# Altium PCB PCB1.PcbDoc
Units mil, origin at the board's own origin, x right, y up, seen from the top; angles counter-clockwise.
Board outline 5019.68 x 3326.77 mil, 2 copper layers (Top Layer, Bottom Layer); 21 components, 13 nets, 70 pads, 0 vias.
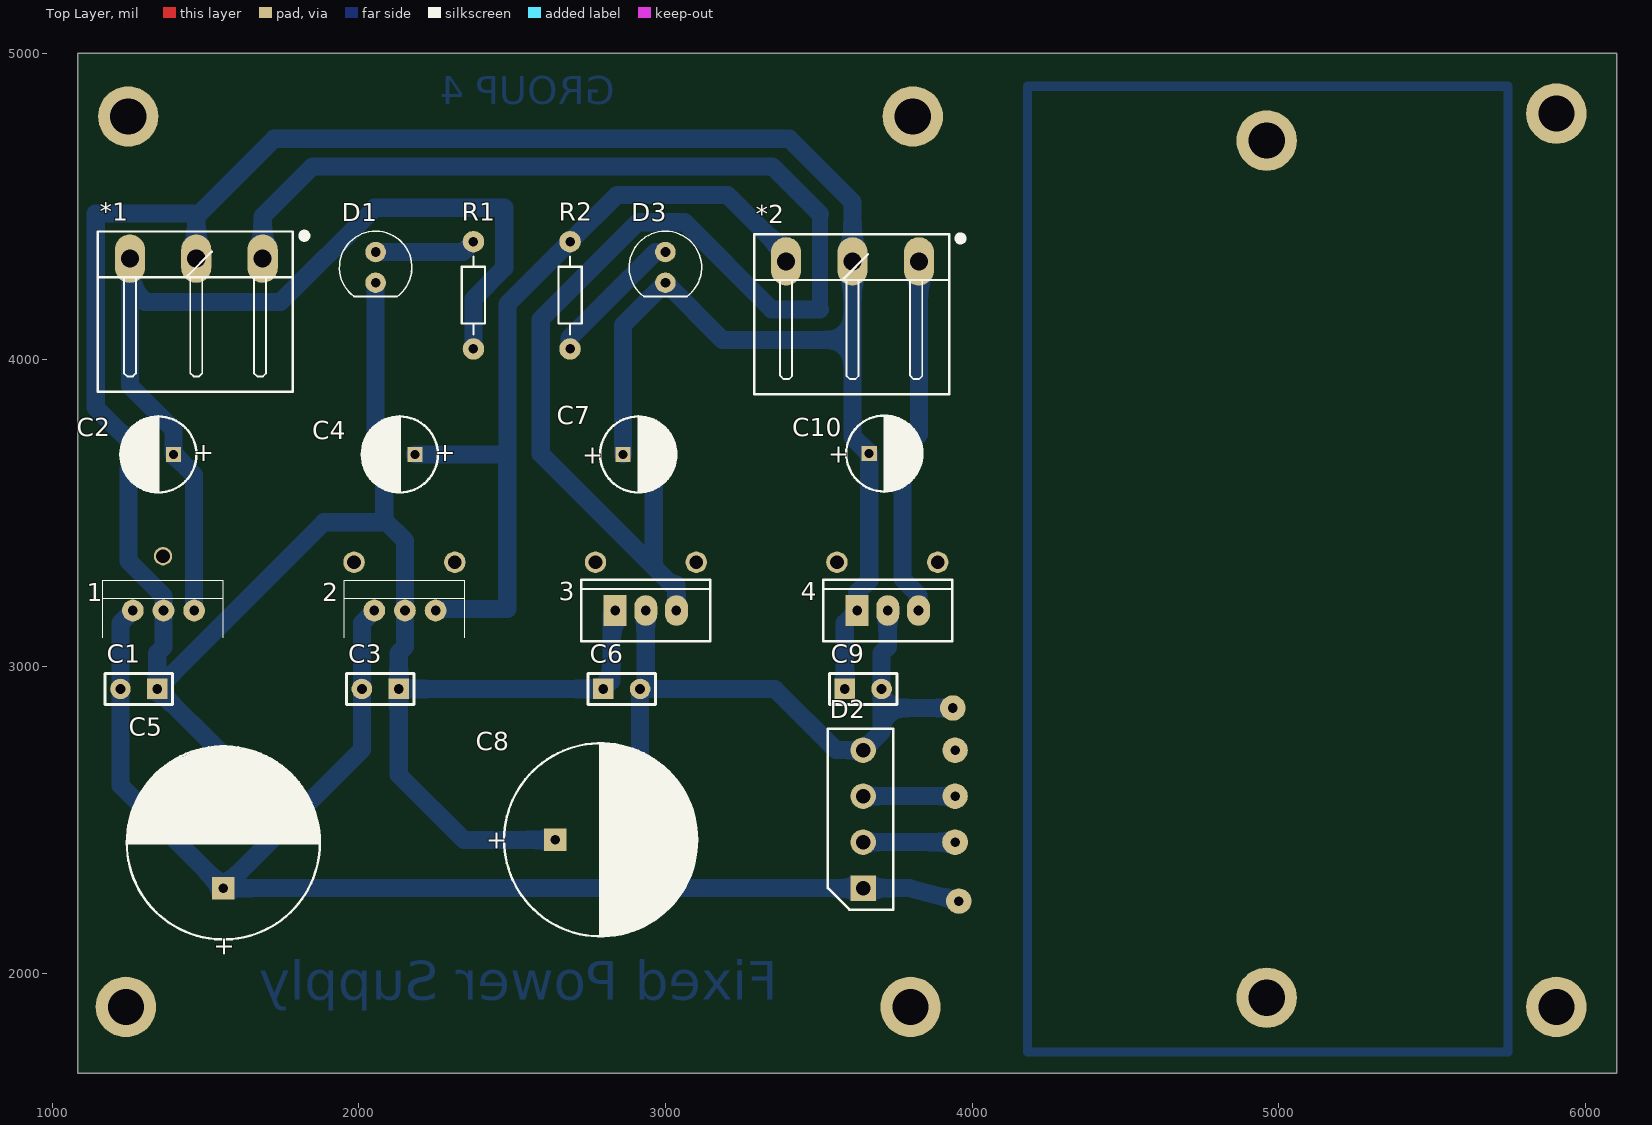
[diagram p0: Top Layer view]
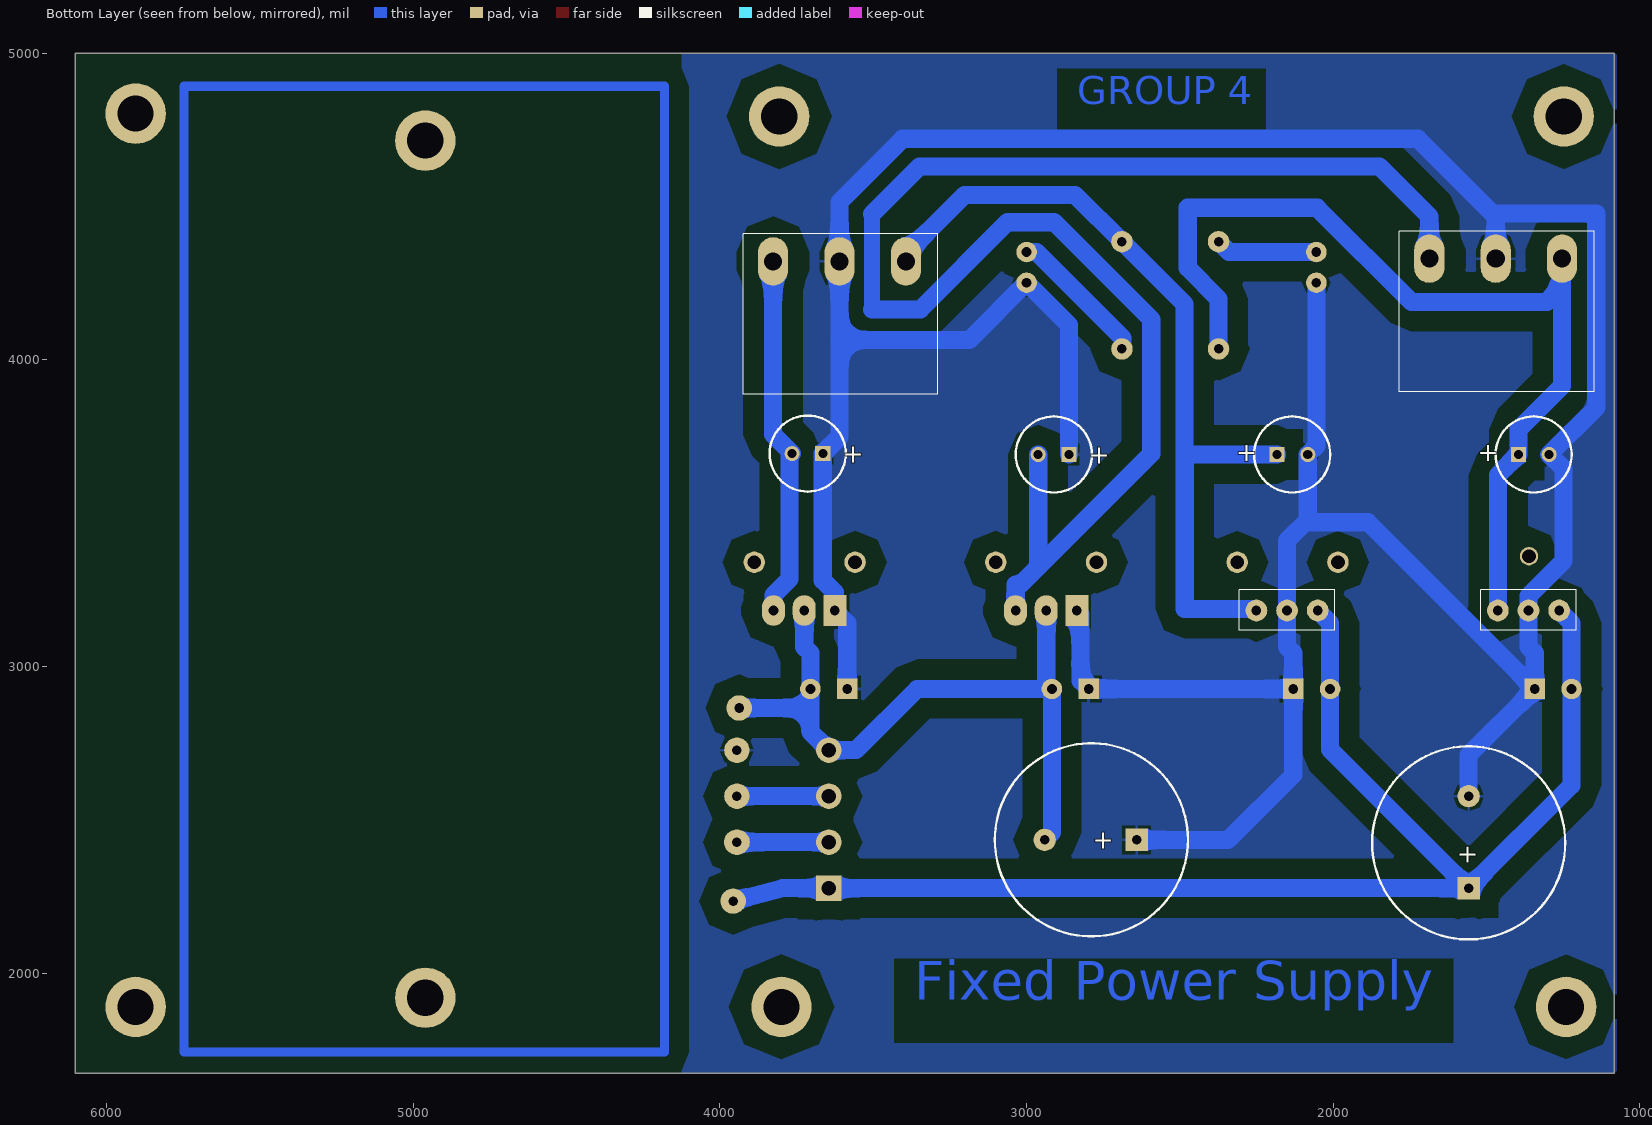
[diagram p1: Bottom Layer view, seen from below]
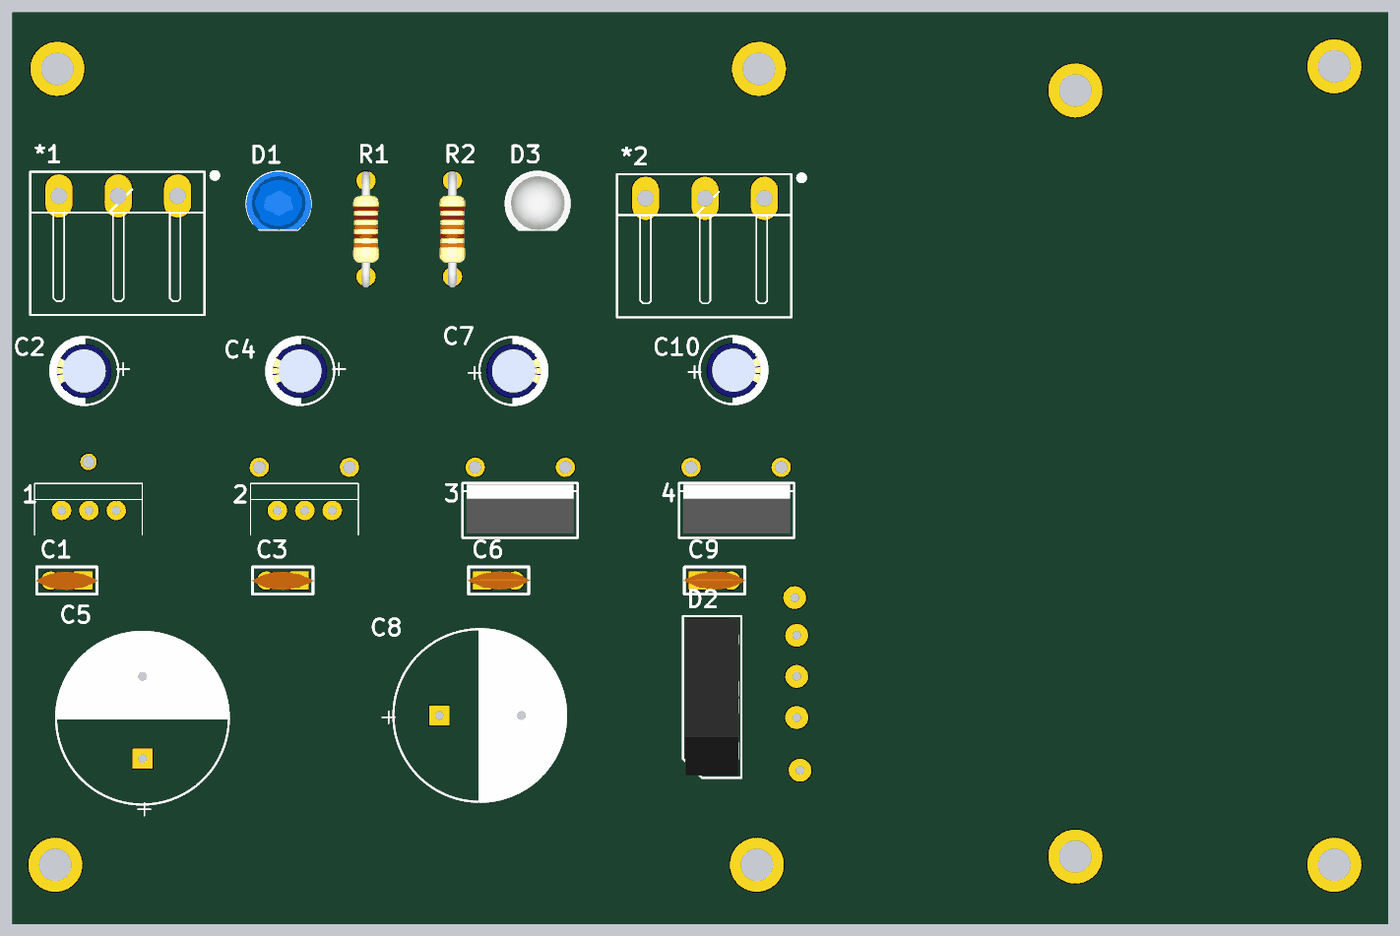
[diagram p2: 3D render of the assembled board from above, using the file's embedded part models]

## Layer stack, top to bottom
Top Solder: solder mask 0.4, Solder Resist, Dk 3.5
Top Layer: signal copper 1.4
Dielectric 1: dielectric 12.6, FR-4, Dk 4.8
Bottom Layer: signal copper 1.4
Bottom Solder: solder mask 0.4, Solder Resist, Dk 3.5

## Board outline
1082.68,1673.23 1082.68,5000 6102.36,5000 6102.36,1673.23

## Design rules (kind name [scope] priority, off if disabled: settings)
Clearance Clearance_1 [(InNamedPolygon('Mechanical 1-No Net'))] p1: gap=60
Clearance [All] p2: gap=30
PolygonConnect [All] p1: connectstyle=Relief reliefconductorwidth=10 reliefentries=4 polygonreliefangle="90 Angle" airgapwidth=10
RoutingLayers [All] p1: top layer_v5=FALSE bottom layer_v5=TRUE
RoutingVias [All] p1: holewidth=28 width=80 viastyle="Through Hole" minholewidth=28 minwidth=80 maxholewidth=28 maxwidth=80
SolderMaskExpansion [All] p1: expansion=4
Width [All] p1: maxlimit=78.74 minlimit=20 preferedwidth=30
29 further rules are at their usual default settings.

## Components (designator, comment, footprint, x,y, rotation, side; value= is the part's Value field where it differs from the comment)
1 "LM78xx" TO-220 1262.79,3182.61 r270 top
2 "LM78xx" TO-220 2050.19,3182.61 r270 top
3 "79xx" TO-220-3 2835.62,3182.61 r0 top
4 "79xx" TO-220-3 3624.99,3182.61 r0 top
*1 "Domino3" "Domino 3N" 1469.71,4330.04 r270 top
*2 "Domino3" "Domino 3N" 3609.84,4321.39 r270 top
C1 "Cap Non-pol" "Cap Non-Pol 3mm" 1282.47,2926.7 r180 top
C2 "Cap Pol" "RADIAL C" 1395.28,3691.47 r180 top
C3 "Cap Non-pol" "Cap Non-Pol 3mm" 2069.87,2926.7 r180 top
C4 "Cap Pol" "RADIAL C" 2182.68,3691.47 r180 top
C5 "2200uF" "RADIAL H(2200u_50V)" 1558.06,2277.09 r90 top
C6 "Cap Non-pol" "Cap Non-Pol 3mm" 2857.28,2926.7 r0 top
C7 "Cap Pol" "RADIAL C" 2861.81,3691.47 r0 top
C8 "2200uF" "RADIAL H(2200u_50V)" 2640.74,2434.57 r0 top
C9 "Cap Non-pol" "Cap Non-Pol 3mm" 3644.68,2926.7 r0 top
C10 "Cap Pol" "RADIAL C" 3664.36,3694.42 r0 top
D1 "LED" "LED-0 5mm BLUE" 2054.72,4301.71 r0 top
D2 "Diode Bridge" "DIODE BRIDGE (1A)" 3644.68,2277.09 r90 top
D3 "LED" "LED-0 5mm RED" 2999.61,4301.71 r0 top
R1 "220" R1/4W 2373.71,4035.53 r90 top
R2 "500" R1/4W 2688.71,4035.53 r90 top

## Footprints (in the part's own frame and the unit in brackets; to place one, negate y for a bottom-side part, rotate by r counter-clockwise, add the part's x,y. Pads: shape width x height; smd on the part's side, far side on the other; paste and mask are expansions set on the pad)
"Cap Non-Pol 3mm" [mil] "Capacitor, Radial; Body 5.6 x 2.5 mm (L x W typ); Pin Spacing 3 mm (typ); Solder Pad 35mil"
  rect 67x67 hole 32: 1(-60,0)
  round 67 hole 32: 2(60,0)
  silkscreen extent -110,-50 110,50, body extent -115,-33 115,34, height 245
"DIODE BRIDGE (1A)" [mil] "Diode Bridge 1A; Solder Pad 35mil"
  rect 83x83 hole 48: 1(0,0)
  round 83 hole 48: 2(150,0) 3(300,0) 4(450,0)
  silkscreen extent -70,-98 520,115, body extent -62,-90 512,107, height 453
"Domino 3N" [mm]
  oval 4x2.5 hole 1.5: 1(0,5.5) 2(0,0) 3(0,-5.5)
  silkscreen extent -2.25,-8.15 11.03,9.2
"LED-0 5mm BLUE" [mil] "Typical LED; BLUE; 2 Leads; Solder Pad 35mil"
  round 67 hole 32: 1(0,50) 2(0,-50)
  silkscreen extent -118,-96 118,118, body extent -118,-96 119,117, height 345
"LED-0 5mm RED" [mil] "Typical LED; RED; 2 Leads; Solder Pad 35mil"
  round 67 hole 32: 1(0,50) 2(0,-50)
  silkscreen extent -118,-96 118,118, body extent -118,-96 119,117, height 345
R1/4W [mil] "R 1/4W, 2 Pin, 350mil"
  round 70 hole 31: 1(0,0) 2(350,0)
  silkscreen extent 48,-38 302,38, body extent -40,-47 386,47, height 111
"RADIAL C" [mm] "Capacitor, Electrolytic, Radial; Body 6.3 x 6.8 mm (Dia.xH typ); Pin Spacing 2.5 mm (typ)"
  rect 1.25x1.25 hole 0.75: 1(0,0)
  round 1.25 hole 0.75: 2(2.54,0)
  silkscreen extent -1.9,-3.15 4.4,3.15, body extent -1.27,-2.54 3.81,2.54, height 13.7
"RADIAL H(2200u_50V)" [mm] "Capacitor, Electrolytic, Radial; Body 16 x 25 mm (Dia.xH typ); Pin Spacing 7.5 mm (typ)"
  rect 1.85x1.85 hole 0.8: 1(0,0)
  round 1.85 hole 0.8: 2(7.62,0)
  silkscreen extent -4.25,-8.03 11.75,8, body extent -4.26,-8.04 11.85,8.01, height 32.12
TO-220 [mm]
  round 1.8 hole 0.8: 1(0,0) 2(0,2.54) 3(0,5.08)
  silkscreen extent -2.5,-2.5 2.25,7.5, body extent -2.4,-2.45 2.1,7.45, height 19.7
TO-220-3 [mm] "TO-220; 3 Leads; Solder Pad 35mil"
  rect 1.905x2.54 hole 0.8: 1(0,0)
  oval 1.905x2.54 hole 0.8: 2(2.54,0) 3(5.08,0)
  silkscreen extent -2.79,-2.54 7.87,2.54, body extent -2.41,-2.11 7.49,2.39, height 19.31

## Part data
1 2: "Regulator"
3 4: "3-Terminal 1A Negative Voltage Regulator"
C1 C3 C6 C9: "Non-polarized Capacitor"
C2 C4 C7 C10: "Polarized Capacitor"
C5 C8: library part CN-ALU-DIP, "Capacitor (Semiconductor SIM Model)"
D1 D3: "Typical LED"
D2: "Full Wave Diode Bridge"
R1 R2: library part R, "Resistor 1/4W"

## Free pads (board coordinates)
  round 60 hole 45: 0(1361.21,3359.77)
  round 83 hole 31.5: 0(3937.01,2864.7) 1(3956.69,2234.78) 7(3944.49,2577.09) 9(3944.49,2726.91)
  round 196.85 hole 118.11: 0(4960.63,1919.82) 1(4960.63,4715.09) 10(3806.69,4793.83) 11(1247.64,4793.83) 16(3799.21,1889.76) 17(1240.16,1889.76) 23(5905.51,4803.15) 24(5905.51,1889.76)
  round 70 hole 45: 1(1984.25,3340.09) 2(2312.99,3340.09) 3(2771.65,3340.09) 4(3100.39,3340.09) 5(3559.06,3340.09) 6(3887.8,3340.09)
  oval 84x83 hole 31.5: 8(3944.49,2427.09)

## Nets (pads, with @x,y where several pads share a name; then routed paths per layer and width w, separated by ;. In a path a pad name is that pad's centre, name@x,y a point inside that pad or via, vN(x,y) a via of type N, cw(c..) or ccw(c..) an arc to the next point about the centre after c; other vN are vias at no path point)
GND: 1.2 2.2 3.1 4.1 *1.2 *2.2 C1.1 C2.2 C3.1 C4.2 C5.2 C6.1 C7.1 C8.1 C9.1 C10.1 D1.2 D3.2 pad.9 | length 12039.4
  Bottom Layer w39.37: C10.1@3664.36,3682.39 C10.1
  Bottom Layer w59.06: *1.2 1469.71,4477.85 1141.73,4477.85 1141.73,3845.02 C2.2 1249,3645.2 1249,3343.64 1362.79,3229.85 1.2 1362.79,3064.16 1342.47,3043.85 C1.1 ; 1469.71,4467.85 1722.86,4721 3404,4721 3609.84,4515.16 *2.2 3609.84,3748.94 C10.1 ; C5.2 1558.06,2711.11 C1.1 ; D1.2 2054.72,3719.42 C4.2 2082.68,3478.32 2150.19,3410.81 2.2 2150.19,3064.16 2129.87,3043.85 C3.1 ; 2082.68,3470.36 1886.13,3470.36 C1.1 ; C8.1 2342.32,2434.57 2129.87,2647.02 C3.1 ; 3.1 2824.25,3171.23 2824.25,2953.67 C6.1 C3.1 ; C7.1 2861.81,4113.91 D3.2 3186.31,4065 3609.84,4065 ; C9.1 3584.68,3142.29 4.1 3624.99,3240.99 3664.36,3280.36 C10.1@3664.36,3682.39
Net1_1: 1.1 2.1 C1.2 C3.2 C5.1 D2.1 pad.1@3956.69,2234.78 | length 4574.7
  Bottom Layer w59.06: 1.1 1222.47,3142.29 C1.2 1222.47,2612.68 C5.1 ; 2.1 2009.87,3142.29 C3.2 2009.87,2728.91 C5.1 ; pad.1@3956.69,2234.78 3796.27,2277.09 D2.1 C5.1
Net3_2: 3.2 4.2 C6.2 C8.2 C9.2 D2.4 pad.0@3937.01,2864.7 | length 2374.2
  Bottom Layer w59.06: 3.2 2935.62,2945.05 C6.2 ; C8.2 2917.27,2458.04 C6.2 ; 4.2 3724.99,3064.17 3704.68,3043.85 C9.2 3704.68,2787.09 ; pad.0@3937.01,2864.7 3704.68,2864.7 3704.68,2787.09 ; C6.2 3356.3,2926.7 3555.91,2727.09 D2.4 3704.68,2787.09
Net*1_1: 3.3 *1.1 C7.2 | length 5156.1
  Bottom Layer w30: 2961.81,3341.66 3035.62,3267.85
  Bottom Layer w51.18: 3503.94,4163.91 3503.94,4475.62
  Bottom Layer w59.06: *1.1 1686.24,4467.85 1849.39,4631 3348.56,4631 3503.94,4475.62 ; 2961.81,3341.66 C7.2 ; 3.3 3035.62,3267.85 3019.15,3267.85 2593,3694 2593,4132 2910,4449 3061.37,4449 3346.46,4163.91 3503.94,4163.91
Net*1_3: 1.3 *1.3 C2.1 R1.1 | length 3104.5
  Bottom Layer w59.06: *1.3 1253.17,4237.85 ; 1.3 1462.79,3623.96 C2.1 1395.28,3772.57 1253.17,3914.68 1253.17,4237.85 ; R1.1 2373.71,4198.71 2474,4299 2474,4496 2051.86,4496 1744.86,4189 1302.02,4189 1253.17,4237.85
Net*2_1: 4.3 *2.1 C10.2 | length 1198.2
  Bottom Layer w30: 4.3@3818.9,3188.7 4.3
  Bottom Layer w39.37: C10.2 3764.36,3692.52 C10.2@3772.37,3684.51
  Bottom Layer w59.06: C10.2 3826.38,3756.43 *2.1 ; C10.2@3772.37,3684.51 3772.37,3285.63 3824.99,3233.01 4.3
Net*2_3: 2.3 *2.3 C4.1 R2.2 | length 3013.6
  Bottom Layer w30: 2.3@2244.09,3188.7 2.3 ; *2.3 *2.3@3393.31,4346.55
  Bottom Layer w39.37: 2.3@2244.09,3188.7 2256.28,3188.7 2.3@2256.42,3188.84
  Bottom Layer w59.06: 2.3@2250.19,3187 2484,3187 2484,3691.47 C4.1 2485,3691.47 2485,4181.82 R2.2 2841.24,4538.06 3201.8,4538.06 *2.3@3393.31,4346.55
NetBT1_1: 
NetBT1_3: 
NetBT1_9: D2.3 pad.7 | length 309.7
  Bottom Layer w59.06: D2.3 pad.7@3954.33,2577.09
NetBT1_11: D2.2 pad.8 | length 309.7
  Bottom Layer w59.06: D2.2 pad.8@3954.33,2427.09
NetD1_1: D1.1 R1.2 | length 333
  Bottom Layer w59.06: D1.1 2339.89,4351.71 R1.2
NetD3_1: D3.1 R2.1 | length 456.5
  Bottom Layer w39.37: R2.1@2687,4053.11 2687,4063 R2.1@2687,4053.11
  Bottom Layer w59.06: R2.1@2687,4063 2687,4070.66 2968.04,4351.71 2975.71,4351.71 D3.1
copper on no net: | length 9433.9
  Bottom Layer w30: 4180.71,1742.65 4180.71,4892.26 5748.03,4892.26 5748.03,1742.65 4180.71,1742.65

## Polygon pours and split planes (outlines as drawn)
GND on Bottom Layer "Mechanical 1-No Net" (solid, pour order 3): 1082.68,5000 4125,5000 4125,1675 4123.23,1673.23 1082.68,1673.23 1075,1680.9 1075,5000

## Other copper
Bottom Layer:
  pour cut-out: 3562.99,2874.02 3562.99,2204.72 3720.47,2204.72 3720.47,2874.02
  pour cut-out: 1732.28,4586.61 2066.93,4586.61 2066.93,4507.87 1850.39,4291.34 1732.28,4291.34
  pour cut-out: 2460.63,4586.61 2775.59,4586.61 2775.59,4547.24 2559.06,4330.71 2460.63,4330.71
  pour cut-out: 3248.03,4586.61 3326.77,4586.61 3464.57,4448.82 3464.57,4409.45 3385.83,4409.45 3248.03,4547.24
  pour cut-out: 3129.92,4488.19 3188.98,4488.19 3326.77,4350.39 3326.77,4291.34 3287.4,4291.34 3129.92,4448.82
  text "GROUP 4" at 2834.65,4803.15 h157.48
  text "Fixed Power Supply" at 3366.14,1870.08 h216.54
  text "Fixed Power Supply" at 3787.01,-1062.99 h200

## Text inside footprints (layer, text, board x,y; h text height)
C2: Top Overlay "+" at 1528.15,3721 h59.06 r180; Bottom Overlay "+" at 1528.15,3721 h59.06 r180
C4: Top Overlay "+" at 2315.55,3721 h59.06 r180; Bottom Overlay "+" at 2315.55,3721 h59.06 r180
C5: Top Overlay "+" at 1587.59,2051.7 h59.06 r90; Bottom Overlay "+" at 1587.59,2351.7 h59.06 r90
C7: Top Overlay "+" at 2728.94,3661.94 h59.06; Bottom Overlay "+" at 2728.94,3661.94 h59.06
C8: Top Overlay "+" at 2415.35,2405.05 h59.06; Bottom Overlay "+" at 2715.35,2405.05 h59.06
C10: Top Overlay "+" at 3531.49,3664.89 h59.06; Bottom Overlay "+" at 3531.49,3664.89 h59.06